# EAGLE board placa1 (EAGLE 8.2.2)
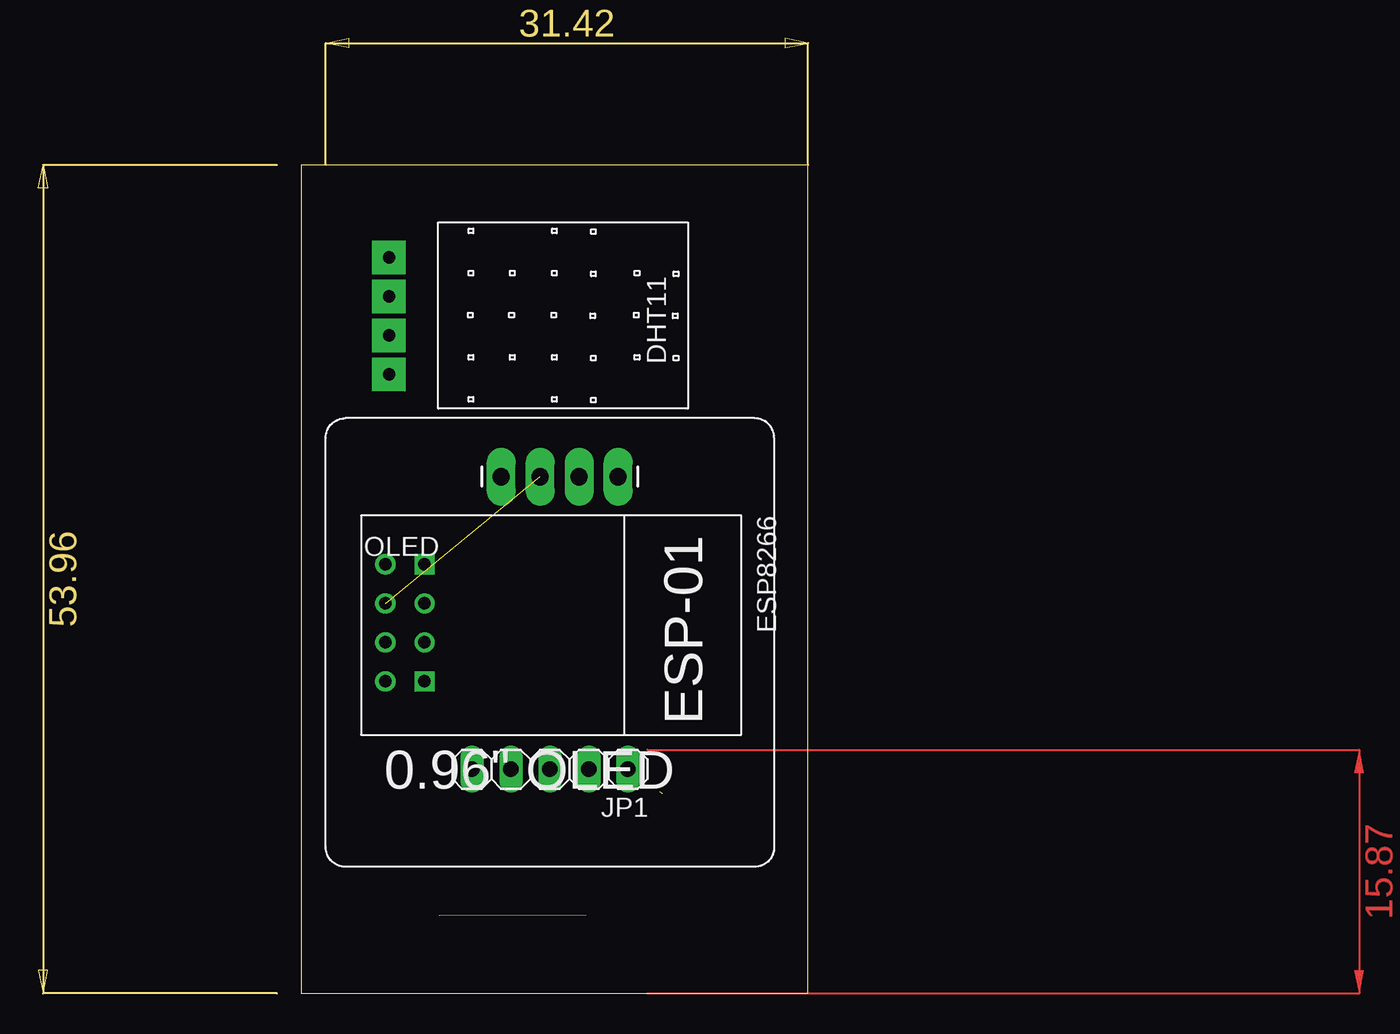
[diagram p0: board, top side]
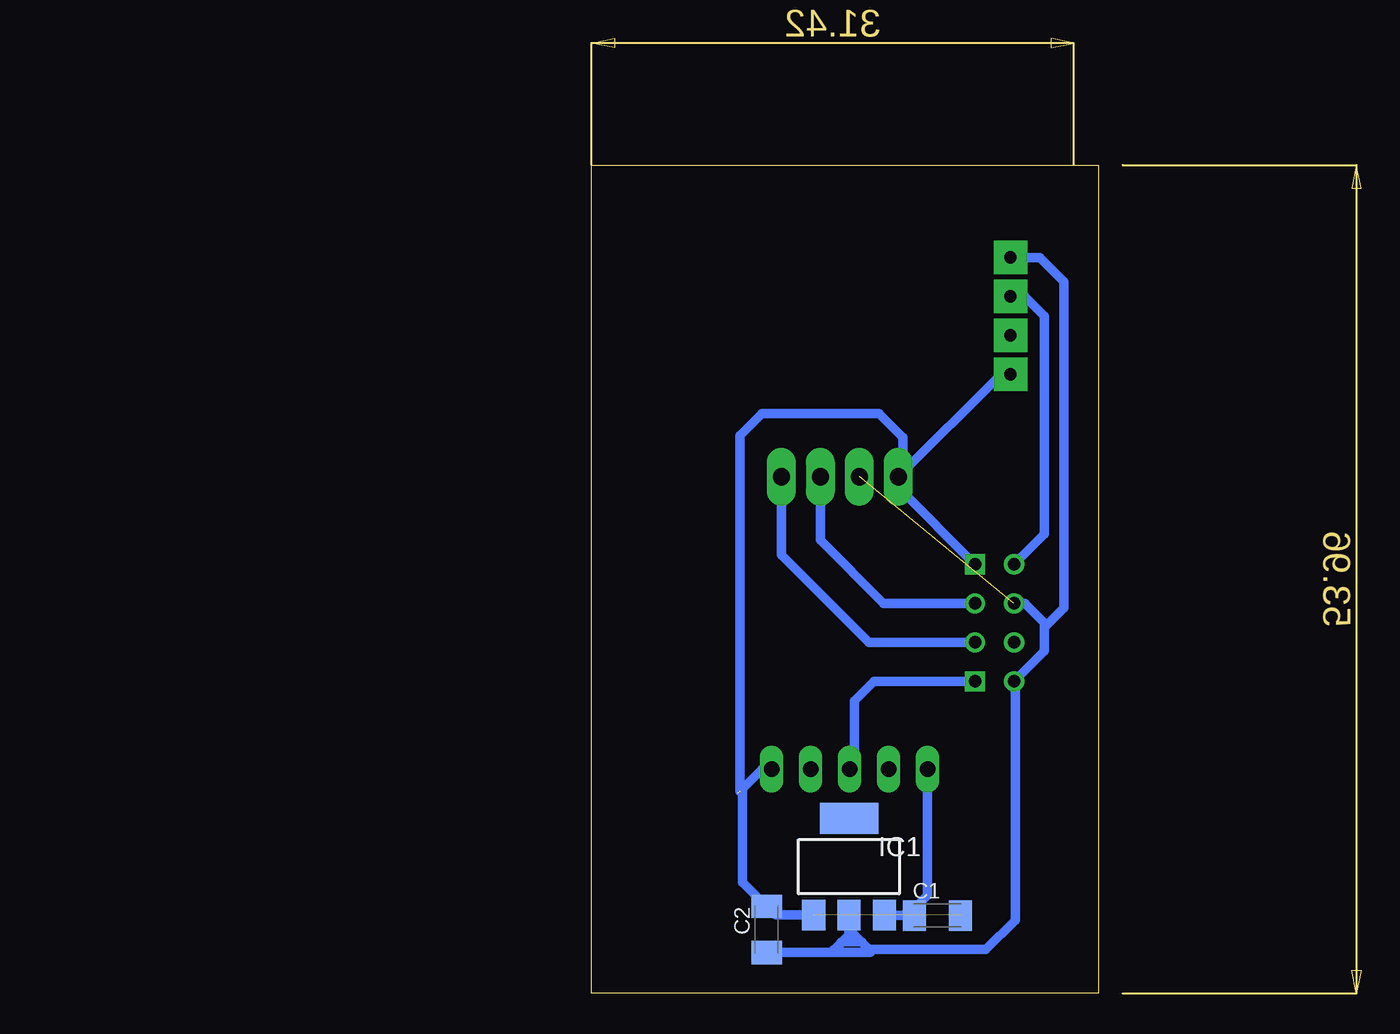
[diagram p1: board, bottom side, seen from below]

Size 33.01 x 53.96 mm. Coordinates in mm from the lower left corner, seen from the top.
Outline: 0,0 33.01,0 33.01,53.96 0,53.96 0,0
Copper layers (1*16): Top 0.035mm / dielectric 1.5mm / Bottom 0.035mm
Design rules "default": minimum track width 10mil, minimum drill 24mil, track to track 8mil, track to pad 8mil, pad to pad 8mil, via to via 8mil, smd to smd 8mil, copper to edge 40mil, drill to drill 8mil, minimum pad ring 10mil, minimum via ring 8mil, stop-mask expansion 4mil, vias tented up to drill 0mil, thermal gap 10mil

## Footprints (pad centres in the part's own frame; a part is rotated, then mirrored left to right if it is on the bottom)
C1206K = smd 1.5 x 2: 1 -1.5,0; 2 1.5,0
ESP01 = drill 0.8: CH_PD -1.285,-8.178; GPIO0 1.255,-5.638; GPIO2 -1.285,-5.638; RST 1.255,-8.178; TX -3.825,-8.178; VCC 3.795,-8.178 | drill 0.8 square: GND -3.825,-5.638; RX 3.795,-5.638
SOT223 = smd 1.5 x 2: 1 -2.3,-3.15; 2 0,-3.15; 3 2.3,-3.15 | smd 3.8 x 2: 4 0,3.15
1X05 = drill 1.016 long: 1 -5.08,0; 2 -2.54,0; 3 0,0; 4 2.54,0; 5 5.08,0
I2C_OLED_PACKAGE = drill 1.118 pad 1.88 long: GND 0,0; SCL 5.08,0; SDA 7.62,0; VCC 2.54,0
DHT11 = drill 0.8 pad 2.184 square: DATA -1.27,-11.43; GND 3.81,-11.43; NO 1.27,-11.43; VCC -3.81,-11.43

## Placement (x,y rotation side)
C1  100nF  [C1206K]  10.48,5.08 0 bottom
C2  10uF  [C1206K]  21.59,4.16 90 bottom
ESP8266  ESP01  [ESP01]  13.65,24.13 270 top
IC1  LD117AS50TR  [SOT223]  16.23,8.25 0 bottom
JP1  [1X05]  16.19,14.6 180 top
OLED  I2C_OLED  [I2C_OLED_PACKAGE]  13.02,33.66 0 top
U$1  [DHT11]  17.15,44.13 270 top

## Library data of the parts
C1 C2 = rcl
ESP8266 = esp8266modules
IC1 = v-reg
JP1 = pinhead
OLED = DIYMall_OLED
U$1 = DHT11

## Nets
3V3: C2.1 ESP8266.CH_PD ESP8266.VCC IC1.2 OLED.VCC U$1.VCC
5V: C1.1 IC1.3 JP1.5
DATA: ESP8266.TX U$1.DATA
GND: C1.2 C2.2 ESP8266.GND IC1.1 JP1.1 OLED.GND U$1.GND
N$3: ESP8266.GPIO2 OLED.SCL
N$4: ESP8266.RX JP1.3
SDA: ESP8266.GPIO0 OLED.SDA

## Tracks (layer width: path | path; a pad name or v marks a point on that pad's centre or on a via)
3V3  (1 unrouted)
  Bottom 0.61: ESP8266.CH_PD 4.78,25.42 3.49,24.13 3.49,23.83 | 3.49,23.83 3.49,22.32 ESP8266.VCC 5.4,20.26 5.4,4.76 7.3,2.86 14.65,2.86 | 16.23,3.77 16.23,3.81 | 16.23,3.81 IC1.2 16.23,4.16 15.36,3.3 | 15.36,3.3 14.92,2.86 14.65,2.86 | U$1.VCC 3.81,47.94 2.22,46.35 2.22,25.1 3.49,23.83 | C2.1 17.37,2.66 | 14.65,2.86 14.84,2.66 17.37,2.66 | 16.23,3.81 16.69,3.35 | 16.92,3.11 16.69,3.35 | 16.92,3.11 17.37,2.66 | 16.69,3.35 16.19,3.35 | 16.19,3.35 15.41,3.35 15.36,3.3 | 16.19,3.35 16.69,3.35 | 16.69,3.35 16.92,3.11
5V
  Bottom 0.61: 12.42,5.08 C1.1 | 12.42,5.08 13.9,5.08 IC1.3 | JP1.5 11.11,6.39 12.42,5.08
DATA
  Bottom 0.61: U$1.DATA 4.76,45.4 3.49,44.13 3.49,29.94 ESP8266.TX
GND  (2 unrouted)
  Bottom 0.61: JP1.1 21.91,14.6 23.18,13.33 | 23.18,13.33 23.34,13.18 23.34,36.35 21.91,37.78 14.29,37.78 12.7,36.2 12.7,33.62 13.02,33.3 | U$1.GND 6.35,40.32 OLED.GND 13.02,33.3 | 13.02,33.3 13.02,32.96 ESP8266.GND | IC1.1 19.37,5.1 19.39,5.1 21.03,5.1 21.53,5.61 C2.2 23.18,7.25 23.18,13.33
N$3
  Bottom 0.61: OLED.SCL 18.1,29.53 13.97,25.4 8.03,25.4 ESP8266.GPIO2
N$4
  Bottom 0.61: ESP8266.RX 14.59,20.34 15.88,19.05 15.88,14.92 JP1.3
SDA
  Bottom 0.61: OLED.SDA 20.64,28.57 14.92,22.86 8.03,22.86 ESP8266.GPIO0
(copper drawn outside any net)
  shapes: Top area x1